# EAGLE board PCB (EAGLE 9.6.2)
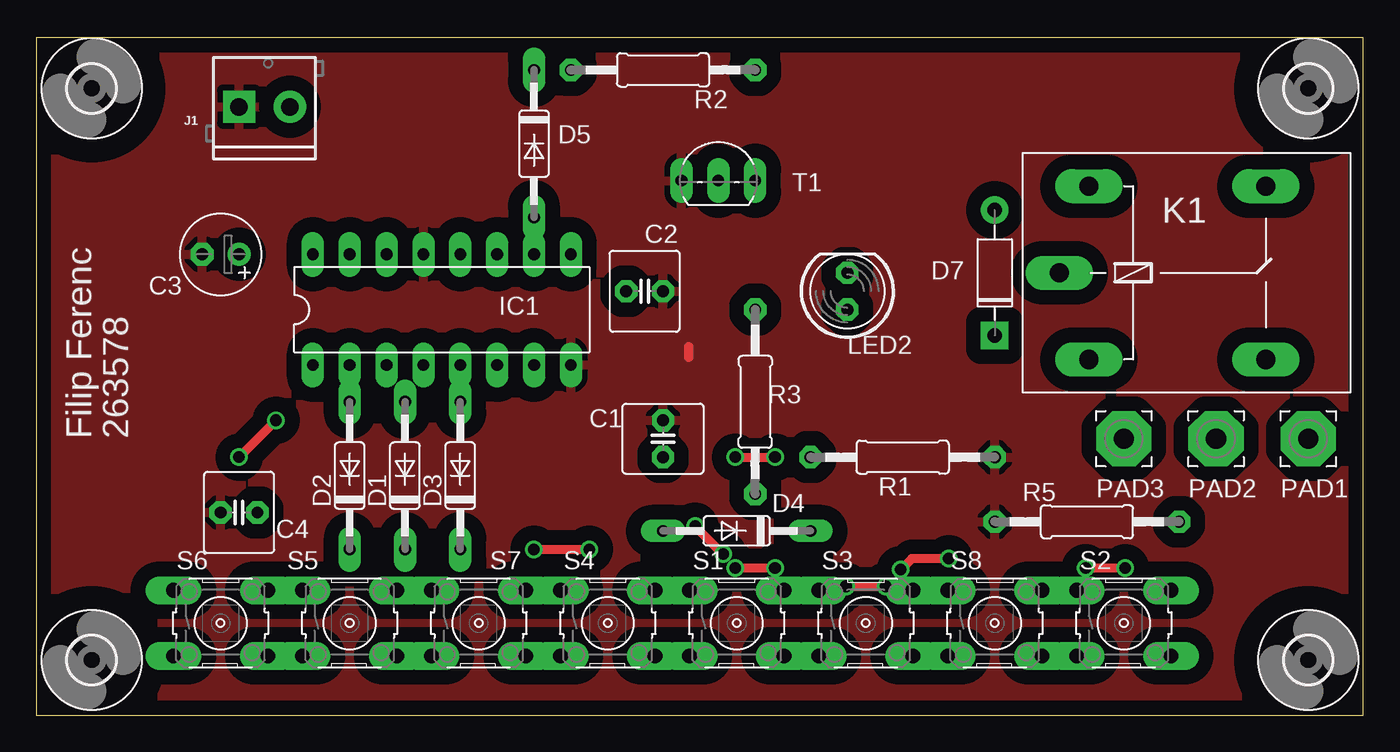
[diagram p0: board, top side]
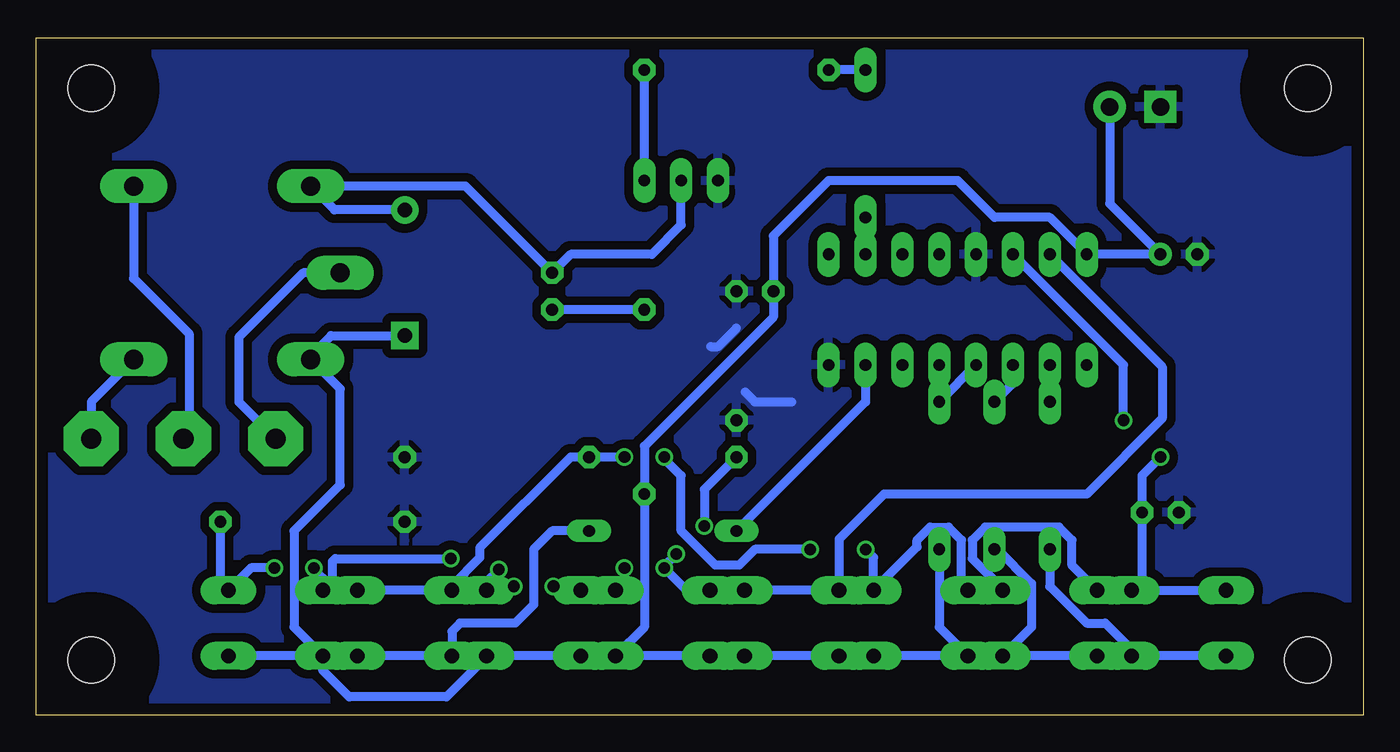
[diagram p1: board, bottom side, seen from below]

Size 91.42 x 46.66 mm. Coordinates in mm from the lower left corner, seen from the top.
Outline: 0,0 91.42,0 91.42,46.66 0,46.66 0,0
Copper layers (1*16): Top 0.035mm / dielectric 1.5mm / Bottom 0.035mm
Design rules "default *": minimum track width 24mil, minimum drill 0.8mm, track to track 18mil, track to pad 18mil, pad to pad 18mil, via to via 18mil, smd to smd 6mil, copper to edge 32mil, drill to drill 6mil, minimum pad ring 10mil, minimum via ring 8mil, stop-mask expansion 4mil, vias tented up to drill 0mil, thermal gap 16mil
Net classes: 1 HV: width 0.61 mm, clearance 1.75 mm

## Footprints (pad centres in the part's own frame; a part is rotated, then mirrored left to right if it is on the bottom)
C025-060X050 = drill 0.813 octagon: 1 -1.27,0; 2 1.27,0
E2,5-6 = drill 0.813 pad 1.6: + -1.27,0 | drill 0.813 pad 1.6 octagon: - 1.27,0
DO35-10 = drill 0.813 long: A 5.08,0; C -5.08,0
DO-41 = drill 1: A 4.325,0 | drill 1 square: C -4.325,0
3,2 = hole 3.2: 0,0
DIL16 = drill 0.813 long: 1 -8.89,-3.81; 2 -6.35,-3.81; 3 -3.81,-3.81; 4 -1.27,-3.81; 5 1.27,-3.81; 6 3.81,-3.81; 7 6.35,-3.81; 8 8.89,-3.81; 9 8.89,3.81; 10 6.35,3.81; 11 3.81,3.81; 12 1.27,3.81; 13 -1.27,3.81; 14 -3.81,3.81; 15 -6.35,3.81; 16 -8.89,3.81
SCREWTERMINAL-3.5MM-2 = drill 1.2 pad 2.032 square: 1 0,0 | drill 1.2 pad 2.032: 2 3.5,0
G5LE = drill 1.321 long: 1 -7.493,-5.969; 2 -7.493,5.969; O 4.699,5.969; P -9.525,0; S 4.699,-5.969
LED5MM = drill 0.813 octagon: A -1.27,0; K 1.27,0
3,81/1,4 = drill 1.397 pad 3.81 octagon: 1 0,0
0207/12 = drill 0.813 octagon: 1 -6.35,0; 2 6.35,0
B3F-10XX = drill 1.016 long: 1 -3.251,2.261; 2 3.251,2.261; 3 -3.251,-2.261; 4 3.251,-2.261
TO92-ECB = drill 0.813 long: B 2.54,0; C 0,0; E -2.54,0

## Placement (x,y rotation side)
C1  100n  [C025-060X050]  43.18,19.05 90 top
C2  100n  [C025-060X050]  41.91,29.21 0 top
C3  100u  [E2,5-6]  12.7,31.75 180 top
C4  100n  [C025-060X050]  13.97,13.97 180 top
D1  1N4148DO35-10  [DO35-10]  25.4,16.51 90 top
D2  1N4148DO35-10  [DO35-10]  21.59,16.51 90 top
D3  1N4148DO35-10  [DO35-10]  29.21,16.51 90 top
D4  1N4148DO35-10  [DO35-10]  48.26,12.7 180 top
D5  1N4148DO35-10  [DO35-10]  34.29,39.37 270 top
D7  1N4007  [DO-41]  66.04,30.48 90 top
H1  MOUNT-HOLE3.2  [3,2]  3.81,3.81 0 top
H2  MOUNT-HOLE3.2  [3,2]  3.81,43.18 0 top
H3  MOUNT-HOLE3.2  [3,2]  87.63,43.18 0 top
H4  MOUNT-HOLE3.2  [3,2]  87.63,3.81 0 top
IC1  4017N  [DIL16]  27.94,27.94 0 top
J1  [SCREWTERMINAL-3.5MM-2]  13.97,41.91 0 top
K1  G5LE  [G5LE]  80.01,30.48 0 top
LED2  [LED5MM]  55.88,29.21 90 top
PAD1  [3,81/1,4]  87.63,19.05 0 top
PAD2  [3,81/1,4]  81.28,19.05 0 top
PAD3  [3,81/1,4]  74.93,19.05 0 top
R1  100k  [0207/12]  59.69,17.78 180 top
R2  100k  [0207/12]  43.18,44.45 180 top
R3  100k  [0207/12]  49.53,21.59 90 top
R5  100k  [0207/12]  72.39,13.34 0 top
S1  [B3F-10XX]  48.26,6.35 0 top
S2  [B3F-10XX]  74.93,6.35 0 top
S3  [B3F-10XX]  57.15,6.35 0 top
S4  [B3F-10XX]  39.37,6.35 0 top
S5  [B3F-10XX]  21.59,6.35 0 top
S6  [B3F-10XX]  12.7,6.35 0 top
S7  [B3F-10XX]  30.48,6.35 0 top
S8  [B3F-10XX]  66.04,6.35 0 top
T1  2SC1815  [TO92-ECB]  46.99,36.83 0 top

## Library data of the parts
C1-C4 = rcl; SPICEPREFIX: C
D1-D5 = diode
D7 = Diodes; CREATED_BY: PCBLayout.com; DIGIKEY_PART_NUMBER: 1N4007MSCT-ND; MANUFACTURER: Micro Commercial Co; MPN: 1N4007; PACKAGE: DO-41
H1-H4 = holes
IC1 = 40xx
J1 = SparkFun-Connectors; PROD_ID: CONN-08399
K1 = relay; OC_FARNELL: unknown; OC_NEWARK: unknown
LED2 = led
PAD1-PAD3 = wirepad
R1-R3 R5 = rcl; SPICEPREFIX: R
S1-S8 = switch-omron; MPN: B3F-1000; OC_FARNELL: 176432; OC_NEWARK: 36M3542
T1 = transistor

## Nets
GND: C1.2 C2.2 C3.- C4.2 IC1.8 IC1.13 J1.1 R1.1 R5.1 T1.E
N$1: C1.1 IC1.15 R5.2 S1.1 S1.2 S2.1 S2.2 S3.1 S3.2 S4.1 S4.2
N$2: D4.C S8.3 S8.4
N$3: D4.A IC1.7
N$4: D3.A IC1.4
N$5: D2.A IC1.2
N$6: D1.A IC1.3
N$7: D3.C S7.3 S7.4
N$8: D2.C S6.3 S6.4
N$9: C4.1 IC1.14 R1.2 S5.1 S5.2 S6.1 S6.2 S7.1 S7.2 S8.1 S8.2
N$10: D1.C S5.3 S5.4
N$11 [HV]: K1.S PAD1.1
N$12: D5.A IC1.10
N$13 [HV]: K1.O PAD2.1
N$14: D7.A K1.2 LED2.K T1.C
N$15: D5.C R2.2
N$16: R2.1 T1.B
N$17: LED2.A R3.2
N$18 [HV]: K1.P PAD3.1
N$21: C2.1 C3.+ D7.C IC1.16 J1.2 K1.1 R3.1 S1.3 S1.4 S2.3 S2.4 S3.3 S3.4 S4.3 S4.4

## Tracks (layer width: path | path; a pad name or v marks a point on that pad's centre or on a via)
GND
  Top 0.61: 44.96,24.64 44.96,25.4
  Bottom 0.61: 42.59,22.27 41.91,21.59 39.37,21.59 | 44.96,25.4 44.45,25.4 43.18,26.67
  pour Bottom (isolate 0.61): 0,0 91.44,0 91.44,46.99 0,46.99
  pour Top (isolate 1.016): 0,0 91.44,0 91.44,46.99 0,46.99
N$1  (via drill 0.8)
  Top 0.61: v62.86,10.8 60.33,10.8 59.57,10.04 v59.55,10.04 | v72.3,10.16 v75.02,10.16 | v55.78,8.89 v58.52,8.89 | v45.39,13.03 v47.32,11.1 | v48.17,10.16 v50.89,10.16
  Bottom 0.61: R5.2 78.74,9.17 S2.2 76.63,10.16 v75.02,10.16 | v58.52,8.89 60.12,8.89 S3.2 60.4,9.18 v59.55,10.04 | v62.86,10.8 70.82,10.8 71.02,10.6 71.02,9.27 S2.1 71.68,9.45 72.39,10.16 v72.3,10.16 | v48.17,10.16 48.26,10.25 48.17,10.25 | v50.89,10.16 50.89,9.23 S1.2 S3.1 54.18,8.89 v55.78,8.89 | IC1.15 13.84,24 13.84,20.45 19.05,15.24 33.02,15.24 36.12,12.14 S4.1 S4.2 S1.1 46.61,8.61 v48.17,10.16 | 48.17,10.25 v48.17,10.16 | C1.1 45.39,15.57 v45.39,13.03 | v47.32,11.1 48.17,10.25
N$2
  Bottom 0.61: D4.C 55.88,12.7 57.15,11.43 57.15,7.62 58.42,6.35 62.23,6.35 62.79,5.79 S8.3 S8.4
N$3
  Bottom 0.61: D4.A 34.29,21.59 IC1.7
N$4
  Bottom 0.61: D3.A IC1.4
N$5
  Bottom 0.61: D2.A IC1.2
N$6
  Bottom 0.61: D1.A 24.13,22.86 IC1.3
N$7
  Bottom 0.61: D3.C 29.21,6.07 S7.3 S7.4
N$8
  Bottom 0.61: D2.C 21.59,8.89 19.05,6.35 17.78,6.35 15.95,4.52 S6.4 S6.3
N$9  (via drill 0.8)
  Top 0.61: v16.51,20.32 v13.97,17.78 | v34.29,11.43 v38.1,11.43 | v48.17,17.78 v50.89,17.78
  Bottom 0.61: S6.2 S6.1 | S6.2 S5.1 20.06,10.33 20.06,12.07 20.96,12.96 26.04,12.96 26.93,12.07 26.93,10.8 24.84,8.7 S5.2 S7.1 27.68,9.06 27.68,12.07 28.57,12.96 29.85,12.96 30.74,12.07 30.74,11.6 S7.2 33.73,10.87 v34.29,11.43 | v16.51,20.32 16.51,24.13 IC1.14 | v48.17,17.78 48.26,17.78 46.99,16.51 46.99,12.7 44.63,10.34 43,10.34 41.91,11.43 v38.1,11.43 | S8.2 S8.1 62.79,8.94 60.86,10.87 60.86,11.52 54.61,17.78 R1.2 v50.89,17.78 | v13.97,17.78 15.24,16.51 C4.1 15.24,9.32 S6.2
N$10
  Bottom 0.61: D1.C 25.22,11.43 22.86,9.07 22.86,6.07 S5.4 S5.3
N$11
  Bottom 0.61: K1.S 87.63,21.59 PAD1.1
N$12
  Bottom 0.61: IC1.10 D5.A
N$13
  Bottom 0.61: K1.O 84.71,30.1 80.9,26.29 80.9,19.43 PAD2.1
N$14
  Bottom 0.61: D7.A 70.87,34.8 K1.2 61.85,36.45 LED2.K 54.61,31.75 49.02,31.75 46.99,33.77 T1.C
N$15
  Bottom 0.61: D5.C R2.2
N$16
  Bottom 0.61: T1.B R2.1
N$17
  Bottom 0.61: R3.2 LED2.A
N$18
  Bottom 0.61: K1.P 73.02,30.48 77.47,26.04 77.47,21.59 PAD3.1
N$21
  Bottom 0.61: S1.4 49.53,6.07 R3.1 49.53,18.54 40.64,27.42 C2.1 40.64,33.02 36.83,36.83 27.94,36.83 25.4,34.29 21.59,34.29 IC1.16 C3.+ 17.47,35.25 J1.2 | S4.3 S4.4 S1.3 S1.4 | S1.4 S3.3 S3.4 61.06,3.43 61.06,3.37 63.17,1.27 69.85,1.27 71.68,3.1 S2.3 | S2.3 73.66,6.07 73.66,12.7 70.48,15.88 70.48,22.48 K1.1 72.52,24.76 71.12,26.16 D7.C | S2.3 S2.4

## Text on the board
tNames: Filip Ferenc | 263578